# EAGLE board Placa cablead_suelo (EAGLE 5.11)
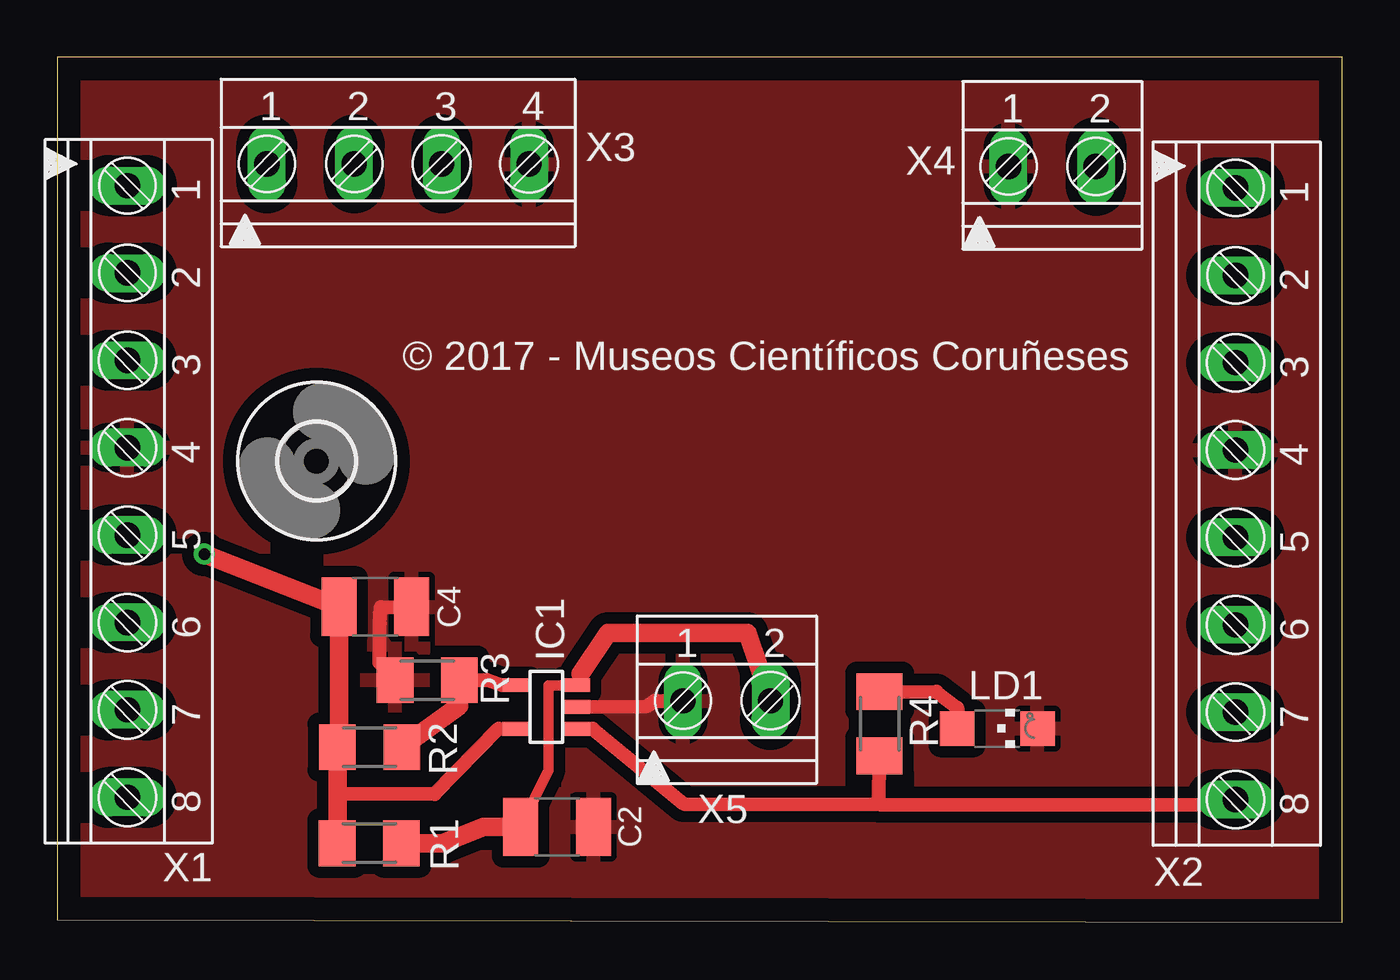
[diagram p0: board, top side]
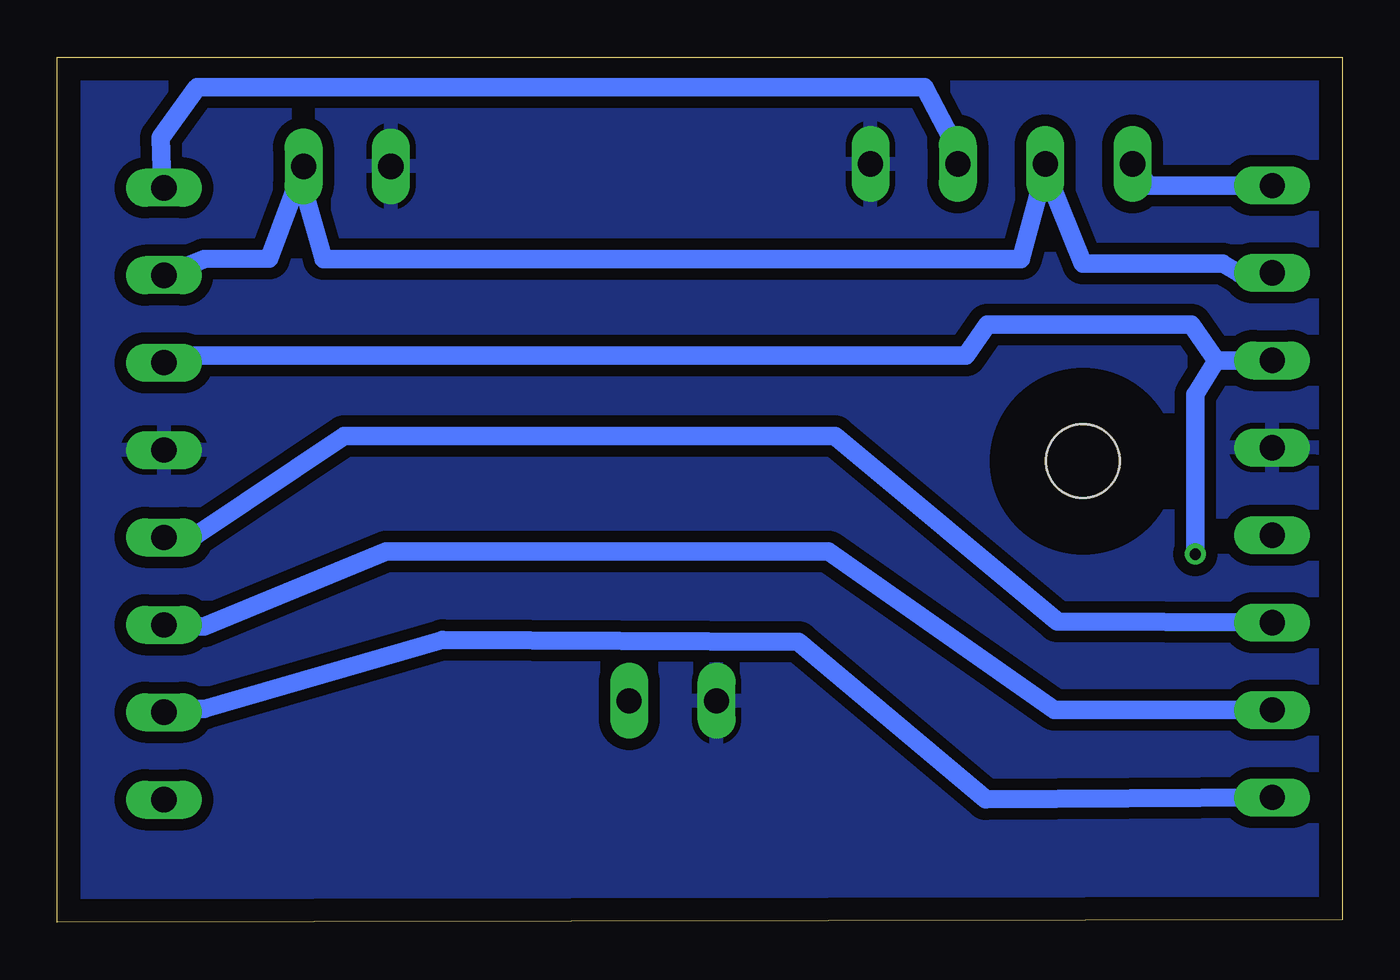
[diagram p1: board, bottom side, seen from below]

Size 56 x 37.7 mm. Coordinates in mm from the lower left corner, seen from the top.
Outline: 0,0.1 56,0 56,37.7 0,37.7 0,0.1
Copper layers (1*16): Top 0.035mm / dielectric 1.5mm / Bottom 0.035mm
Design rules "default *": minimum track width 10mil, minimum drill 24mil, track to track 0.5mm, track to pad 0.5mm, pad to pad 0.5mm, via to via 0.5mm, smd to smd 0.5mm, copper to edge 40mil, drill to drill 8mil, minimum pad ring 10mil, minimum via ring 8mil, stop-mask expansion 4mil, vias tented up to drill 0mil, thermal gap 10mil

## Footprints (pad centres in the part's own frame; a part is rotated, then mirrored left to right if it is on the bottom)
1210 = smd 1.524 x 2.54: P$1 -1.587,0; P$2 1.587,0
3,2 = hole 3.2: 0,0
SOT23-5 = smd 0.6 x 1.2: 1 -0.95,-1.306; 2 0,-1.306; 3 0.95,-1.306; 4 0.95,1.306; 5 -0.95,1.306
CHIPLED_1206 = smd 1.5 x 1.5: A 0,-1.75; C 0,1.75
M1206 = smd 1.6 x 2: 1 -1.4,0; 2 1.4,0
8POL381 = drill 1.1 long: 1 0,0; 2 3.81,0; 3 7.62,0; 4 11.43,0; 5 15.24,0; 6 19.05,0; 7 22.86,0; 8 26.67,0
4POL381 = drill 1.1 long: 1 0,0; 2 3.81,0; 3 7.62,0; 4 11.43,0
2POL381 = drill 1.1 long: 1 0,0; 2 3.81,0

## Placement (x,y rotation side)
C2  100nF  [1210]  21.78,4.16 0 top
C4  100nF  [1210]  13.86,13.75 0 top
H1  MOUNT-HOLE3.2  [3,2]  11.3,20.1 0 top
IC1  OPA345NA  [SOT23-5]  21.31,9.38 90 top
LD1  [CHIPLED_1206]  40.97,8.44 270 top
R1  1K  [M1206]  13.59,3.44 180 top
R2  1K  [M1206]  13.61,7.63 180 top
R3  1K  [M1206]  16.12,10.55 0 top
R4  4K7  [M1206]  35.84,8.65 270 top
X1  MKDS1/8-3,81  [8POL381]  3.05,32.11 270 top
X2  MKDS1/8-3,81  [8POL381]  51.35,32.01 270 top
X3  MKDS1/4-3,81  [4POL381]  9.13,33.05 0 top
X4  MKDS1/2-3,81  [2POL381]  41.46,32.95 0 top
X5  MKDS1/2-3,81  [2POL381]  27.27,9.65 0 top

## Library data of the parts
C2 C4 = cap-master
H1 = holes
IC1 = burr-brown
LD1 = led
R1-R4 = rcl-2(1)
X1-X5 = con-phoenix-381

## Nets
GND: C2.P$2 C4.P$2 IC1.2 LD1.C R3.1 X1.4 X2.4 X3.4 X4.1 X5.1
N$1: X1.6 X2.5
N$2: X1.1 X3.1
N$3: X2.1 X3.3
N$4: X1.2 X2.2 X3.2 X4.2
N$5: C4.P$1 IC1.5 R1.2 R2.2 X1.3 X2.3
N$6: IC1.4 R2.1 R3.2
N$7: X1.7 X2.6
N$8: X1.8 X2.7
N$9: C2.P$1 IC1.3 R1.1 X5.2
N$10: IC1.1 R4.2 X2.8
N$11: LD1.A R4.1

## Tracks (layer width: path | path; a pad name or v marks a point on that pad's centre or on a via)
GND
  Top 0.6: IC1.2 25.68,9.41 26.05,9.65 X5.1 | R3.1 14.04,11.31 14.05,13.01 14.09,13.73 C4.P$2
  pour Bottom: -0.3,38 56.6,38.1 56.4,-0.7 -0.4,-0.3
  pour Top: -0.3,38 56.6,38.1 56.5,-0.7 -0.4,-0.3
N$1
  Bottom 0.813: X1.6 12.41,13.1 22.1,21.2 43.5,21.2 49.9,16.9 51.22,16.9 X2.5
N$2
  Bottom 0.813: X1.1 8.43,32.11 X3.1
N$3
  Bottom 0.813: X3.3 16.55,33.25 18.2,36.4 49.9,36.4 51.5,34.2 51.44,32.2 X2.1
N$4
  Bottom 0.813: X1.2 4.5,28.3 5.2,28.7 11.3,28.7 12.84,32.54 X3.2 13.04,32.46 14,28.9 44.4,28.9 45.3,32.1 45.2,31.88 X4.2 46.77,28.93 49.6,28.9 X2.2
N$5  (via drill 0.5)
  Top 0.6: IC1.5 19.24,8.44 16.45,5.59 12.21,5.61
  Top 0.813: v6.4,16.05 C4.P$1 12.28,8.24 R2.2 12.21,5.61 12.21,5.06 R1.2
  Bottom 0.813: 5.49,24.49 X1.3 | 5.49,24.49 6.57,26.04 15.47,26.04 16.4,24.7 50.3,24.7 50.7,24.3 51.26,24.3 X2.3 | v6.4,16.05 6.4,23 5.49,24.49
N$6
  Top 0.45: 19.4,10.33 IC1.4
  Top 0.6: R3.2 18.75,10.56 19.4,10.33
  Top 0.813: R2.1 17.52,9.43 R3.2
N$7
  Bottom 0.813: X1.7 12.55,9.25 22.39,16.17 41.66,16.17 49.6,12.9 51.29,12.9 X2.6
N$8
  Bottom 0.813: X1.8 15.53,5.36 23.69,12.22 39.2,12.3 49.6,9.3 51.2,9.3 X2.7
N$9
  Top 0.45: C2.P$1 21.4,6.64 21.4,10.32 IC1.3 22.81,10.82
  Top 0.813: R1.1 16.79,3.44 18.57,4.16 C2.P$1 | X5.2 30.09,12.61 24,12.61 22.81,10.82
N$10
  Top 0.6: IC1.1 23.33,8.43 27.3,5.16 35.81,5.14 | 35.81,5.14 50.62,5.12 X2.8 | 35.81,5.14 R4.2
N$11
  Top 0.6: R4.1 38.32,10.04 39.22,9.35 LD1.A

## Text on the board
tNames: © 2017 - Museos Científicos Coruñeses